# Altium PCB nrf52840_bma250e.PcbDoc
Units mil, origin at the board's own origin, x right, y up, seen from the top; angles counter-clockwise.
Board outline 748.03 x 984.25 mil, 2 copper layers (Top Layer, Bottom Layer), stack 12.8 mil thick; 27 components, 62 nets, 152 pads, 43 vias.
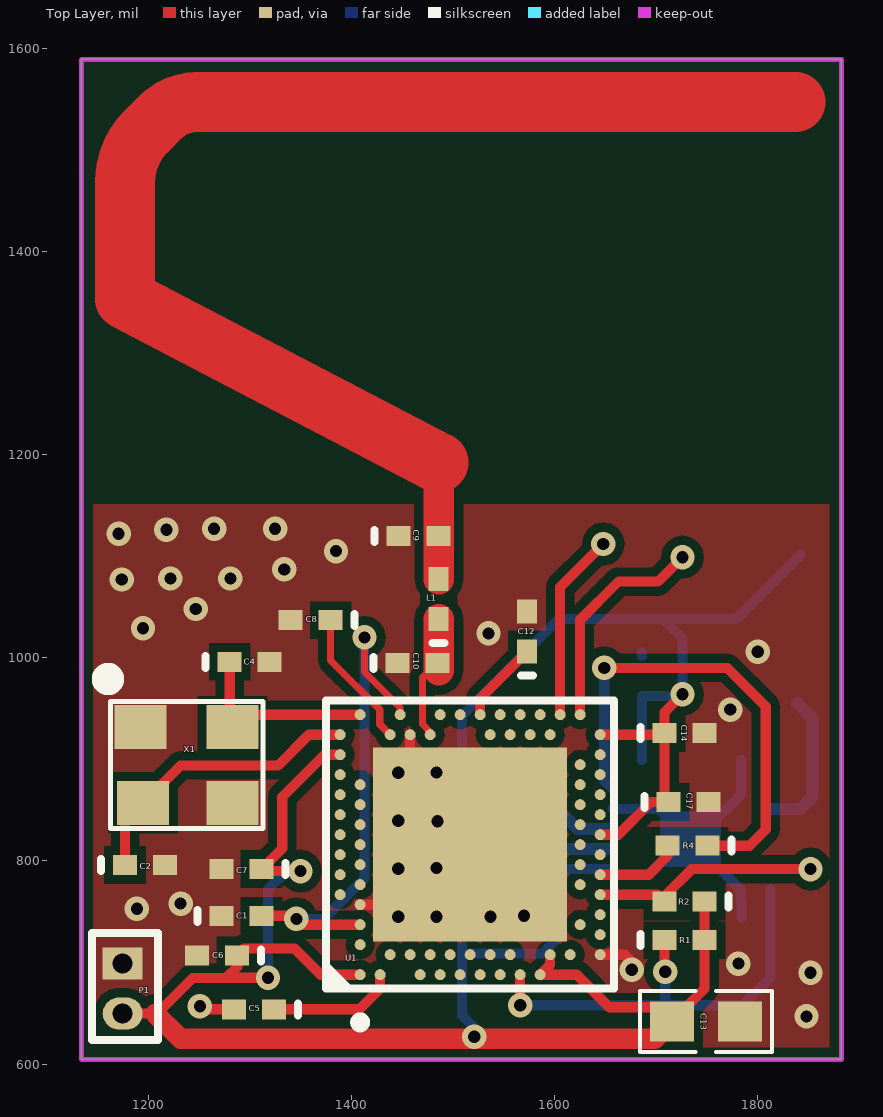
[diagram p0: Top Layer view]
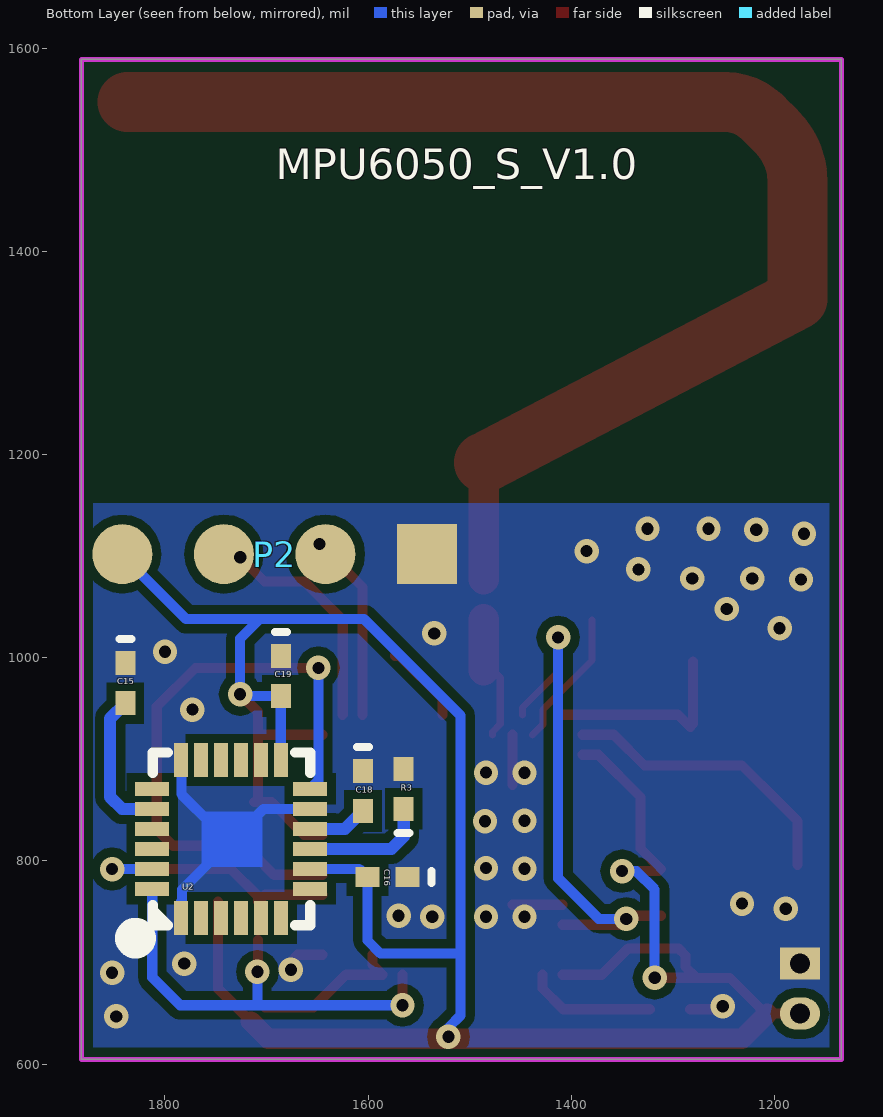
[diagram p1: Bottom Layer view, seen from below]

## Layer stack, top to bottom
Top Layer: signal copper 1.4
Dielectric: core 10, FR-4, Dk 4.2
Bottom Layer: signal copper 1.4

## Board outline
1134.28,604.76 1882.31,604.76 1882.31,1589.02 1134.28,1589.02

## Design rules (kind name [scope] priority, off if disabled: settings)
Clearance [All] p1: gap=5
ComponentClearance [All] p1 off: gap=10 collisioncheckmode=3 verticalgap=10 showdistances=FALSE
Height [All] p1 off: minheight=0 maxheight=1000 prefheight=500
MinimumSolderMaskSliver [All] p1 off: minsoldermaskwidth=10
NetAntennae [All] p1 off: netantennaetolerance=0
PlaneConnect [All] p1: planeconnectstyle=Direct reliefexpansion=20 reliefentries=4 reliefconductorwidth=10 reliefairgap=10
PolygonConnect [All] p1: connectstyle=Direct reliefconductorwidth=10 reliefentries=4 polygonreliefangle="90 Angle"
RoutingVias [All] p1: holewidth=28 width=50 viastyle="Through Hole" minholewidth=28 minwidth=50 maxholewidth=28 maxwidth=50
SilkToSilkClearance [All] p1 off: silktosilkclearance=10
SilkscreenOverComponentPads SilkToSolderMaskClearance [IsPad] p1 off: minsilkscreentomaskgap=10
SolderMaskExpansion [All] p1: expansion=4
Width [All] p1: maxlimit=100 minlimit=1 preferedwidth=10 minimp=50.000000 maximp=50.000000 favimp=50.000000
21 further rules are at their usual default settings.

## Components (designator, comment, footprint, x,y, rotation, side; value= is the part's Value field where it differs from the comment)
C1 "1.0μF" 0402-A 1292,746 r0 top
C2 "12pF" 0402-A 1197,796 r0 top
C4 "12pF" 0402-A 1300,996 r0 top
C5 "100nF" 0402-A 1304,654 r180 top
C6 "1.0μF" 0402-A 1268,707 r180 top
C7 "100nF" 0402-A 1292,792 r180 top
C8 "100pF" 0402-A 1360,1037 r180 top
C9 "NC" 0402-A 1466,1120 r0 top
C10 "NC" 0402-A 1465,995 r0 top
C12 "820pF" 0402-A 1573,1026 r90 top
C13 "4.7μF" 0603-1 1749,642 r0 top
C14 "100nF" 0402-a 1728,926 r0 top
C15 "2.2nf" 0402-A 1839,975 r270 bottom
C16 "0.1uF" 0402-A 1581,784 r0 bottom
C17 "100nF" 0402-a 1732,858 r0 top
C18 "0.1uF" 0402-A 1605,869 r270 bottom
C19 "0.1uF" 0402-A 1686,982 r270 bottom
L1 "NC" 0402-A 1486,1058 r90 top
P1 "Header 2" HDR1_2_1.25 1175,699 r270 top
P2 "Header 4" HDR1X4 1542,1102 r0 top
R1 "4.7K" 0402-A 1728,722 r0 top
R2 "4.7K" 0402-A 1728,760 r180 top
R3 "4.7K" 0402-A 1565,871 r90 bottom
R4 "0R" 0402-A 1731,815 r180 top
U1 "nRF52840-QIAA" AQFN50P700X700X85_HS-74N 1517,816 r90 top
U2 "mpu6050" mpu6050 1784,744 r90 bottom
X1 "32MHz" SMD3225 1283,932 r180 top

## Footprints (in the part's own frame and the unit in brackets; to place one, negate y for a bottom-side part, rotate by r counter-clockwise, add the part's x,y. Pads: shape width x height; smd on the part's side, far side on the other; paste and mask are expansions set on the pad)
0402-A [mm] "Chip Inductor; Body 1 x 0.5 mm (LxW typ)"
  rect 0.6x0.5 smd: 1(-0.5,0) 2(0.5,0)
  silkscreen extent -1.1,-0.15 -1.1,0.15
0402-a [mm] "Chip Inductor; Body 1 x 0.5 mm (LxW typ)"
  rect 0.6x0.5 smd: 1(-0.5,0) 2(0.5,0)
  silkscreen extent -1.1,-0.15 -1.1,0.15
0603-1 [mm]
  rect 1.1x1 smd: 1(-0.85,0) 2(0.85,0)
  silkscreen extent -1.65,-0.76 1.65,0.76, body extent -1.14,-0.38 1.14,0.38, height 1
AQFN50P700X700X85_HS-74N [mm]
  rect 4.85x4.85 smd mask+0.05: 74(0,0)
  round 0.275 smd paste+0.012 mask+0.05: A8(-1.25,3.25) A10(-0.75,3.25) A12(-0.25,3.25) A14(0.25,3.25) A16(0.75,3.25) A18(1.25,3.25) A20(1.75,3.25) A22(2.25,3.25) A23(2.75,3.25) AA24(3.25,-2.25) AB2(-2.75,-2.5) AC5(-2,-2.75) AC9(-1,-2.75) AC11(-0.5,-2.75) AC13(0,-2.75) AC15(0.5,-2.75) AC17(1,-2.75) AC19(1.5,-2.75) AC21(2,-2.75) AC24(3.25,-2.75) AD2(-2.75,-3.25) AD4(-2.25,-3.25) AD6(-1.75,-3.25) AD8(-1.25,-3.25) AD10(-0.75,-3.25) AD12(-0.25,-3.25) AD14(0.25,-3.25) AD16(0.75,-3.25) AD18(1.25,-3.25) AD20(1.75,-3.25) AD22(2.25,-3.25) AD23(2.75,-3.25) B1(-3.25,2.75) B3(-2.5,2.75) B5(-2,2.75) B7(-1.5,2.75) B9(-1,2.75) B11(-0.5,2.75) B13(0,2.75) B15(0.5,2.75) B17(1,2.75) B19(1.5,2.75) B24(3.25,2.75) C1(-3.25,2.25) D2(-2.75,2) D23(2.75,2) E24(3.25,1.75) F2(-2.75,1.5) F23(2.75,1.5) G1(-3.25,1.25) H2(-2.75,1) H23(2.75,1) J1(-3.25,0.75) J24(3.25,0.75) K2(-2.75,0.5) L1(-3.25,0.25) L24(3.25,0.25) M2(-2.75,0) N1(-3.25,-0.25) N24(3.25,-0.25) P2(-2.75,-0.5) P23(2.75,-0.5) R1(-3.25,-0.75) R24(3.25,-0.75) T2(-2.75,-1) T23(2.75,-1) U1(-3.25,-1.25) U24(3.25,-1.25) V23(2.75,-1.5) W1(-3.25,-1.75) W24(3.25,-1.75) Y2(-2.75,-2) Y23(2.75,-2)
  silkscreen extent -4.56,-3.6 3.6,3.6, body extent -3.55,-3.55 3.55,3.55, height 0.85
HDR1_2_1.25 [mm]
  rect 0.8x1 hole 0.5: 1(0,0)
  oval 0.8x1 hole 0.5: 2(1.25,0)
  silkscreen extent -0.76,-0.76 1.91,0.89
HDR1X4 [mm] "Connector; Header; 4 Position"
  rect 1.5x1.5 smd far side: 1(0,0)
  round 1.5 smd far side: 2(2.54,0) 3(5.08,0) 4(7.62,0)
mpu6050 [mm]
  rect 0.85x0.35 smd: 1(0,0) 2(0,-0.5) 3(0,-1) 4(0,-1.5) 5(0,-2) 6(0,-2.5) 13(3.95,-2.5) 14(3.95,-2) 15(3.95,-1.5) 16(3.95,-1) 17(3.95,-0.5) 18(3.95,0)
  rect 0.35x0.85 smd: 7(0.725,-3.225) 8(1.225,-3.225) 9(1.725,-3.225) 10(2.225,-3.225) 11(2.725,-3.225) 12(3.225,-3.225) 19(3.225,0.725) 20(2.725,0.725) 21(2.225,0.725) 22(1.725,0.725) 23(1.225,0.725) 24(0.725,0.725)
  Top Layer region: 1.267,-0.508 2.664,-0.508 2.664,-2.032 1.267,-2.032
  silkscreen extent -0.63,-3.22 4.13,1.27
SMD3225 [mm]
  rect 1.3x1.1 smd: 1(0,0) 2(2.3,0) 3(2.23,1.9) 4(0,1.9)
  silkscreen extent -0.76,-1.32 3.24,2.54

## Part data
C1 C6: library part C0603-1?, "Capacitor, X7R, ±10%"
C2 C4: library part C0402-12p, "Capacitor, NP0, ±2%"
C5 C7 C14 C17: library part C0402-100n, "Capacitor, X7R, ±10%"
C8: library part C0402-100p, "Capacitor, NP0, ±5%"
C9 C10: library part C0402-0.8p, "Capacitor, NP0, ±10%"
C12: library part C0402-820p, "Capacitor, NP0, ±5%"
C13: library part C0603-4μ7-6.3, "Capacitor, X7R, ±10%"
C15 C16 C18 C19: library part C0402-0.5p, "Capacitor, NP0, ±10%"
L1: library part L0402-4n7, "High frequency chip inductor ±5%"
P1: "Header, 2-Pin"
P2: "Header, 4-Pin"
R1 R2 R3 R4: library part Res1, "Resistor"
U1: library part nRF52840-QIAAD0, "Multi-protocol Bluetooth Low Energy, IEEE 802.15.4, ANT and 2.4GHz proprietary system-on-chip"
X1: library part XTAL_SMD2016_32MHz_8pF_General, "XTAL SMD 2016, 32MHz, Cl=8pF, Total Tol: ±40ppm"

## Via types
v1: diameter 24, hole 12, Top Layer to Bottom Layer, 43 vias

## Nets (pads, with @x,y where several pads share a name; then routed paths per layer and width w, separated by ;. In a path a pad name is that pad's centre, name@x,y a point inside that pad or via, vN(x,y) a via of type N, cw(c..) or ccw(c..) an arc to the next point about the centre after c; other vN are vias at no path point)
DEC1: C5.1 U1.C1 | length 127.8
  Top Layer w10: C5.1@1322.69,654 1408,654 1428.42,674.42 U1.C1
DEC3: C8.1 U1.D23 | length 137
  Top Layer w7: C8.1 1379.69,997.32 1428,949 1428,934.53 U1.D23
DEC4_6: C1.2 U1.B5 U1.E24 | length 511.8
  Top Layer w7: v1(1413,1020) 1413,986 1448.1,950.9 U1.E24
  Top Layer w10: C1.2 1341,746 1349.74,737.26 U1.B5
  Bottom Layer w10: v1(1346,743) 1373,743 1413,783 v1(1413,1020)
GND: C1.1 C2.2 C4.2 C5.2 C6.2 C7.2 C8.2 C9.1 C10.1 C12.2 C13.2 C14.2 C15.1 C16.1 C17.2 C18.1 C19.1 P1.1 P2.1 R3.2 U1.74 U1.AD2 U1.B7 U1.F23 U2.1 U2.11 U2.18 X1.2 X1.4 | length 401.6
  Top Layer w10: v1(1251,657) 1254,654 C5.2@1283.31,654 ; U1.B7 U1.74@1457.94,756.94 ; U1.74@1457.94,875.06 U1.F23 ; U1.AD2 1669.27,707.73 1676,701 v1(1676,693)
  Bottom Layer w10: U2.11 1702.72,851.28 1717,837 ; C19.1 C19.1@1686,1005 ; 1744,834 1752,834 1783.81,865.81 1783.81,899.32 U2.18 ; 1753,803 1753,802 1783.2,771.8 1783.2,761 1784,760.2 U2.1
  other v1: 1848,647 1852,690 1781,699 1446.13,745.13 1484,745 1537,745 1570,746 1189,753 1232,758 1446.13,792.38 1484,793 1485,839 1446.13,839.62 1446.13,886.87 1484,887 1773,949 1800,1006 1535,1024 1195,1029 1247,1048 1174,1077 1222,1078 1281,1078 1334,1087 1385,1105 1171,1122 1218,1126 1265,1127 1325,1127
NetC10_2: C10.2 L1.1 U1.H23 | length 130
  Top Layer w7: U1.H23 1477.63,927.09 1470,934.72 1470,980.31 C10.2
  Top Layer w30: C10.2@1486,987.76 L1.1@1486,1037.76
NetC12_1: C12.1 U1.N24 | length 79.8
  Top Layer w10: U1.N24 1526.84,959.84 1569,1002 C12.1@1573.32,1002
NetC15_2: C15.2 U2.20 | length 144.8
  Bottom Layer w12: U2.20 1842.28,851.28 1854,863 1854,940.31 C15.2
NetC18_2: C18.2 U2.10 | length 59.4
  Bottom Layer w12: C18.2 1622.72,831.6 U2.10
NetR3_1: R3.1 U2.9 | length 124.4
  Bottom Layer w12: R3.1 1565,824 1577.09,811.91 U2.9
NetR4_1: R4.1 U2.12 | length 482
  Top Layer w10: v1(1649,990) 1770,990 1808,952 1808,831 1792,815 R4.1
  Bottom Layer w10: v1(1649,990) 1649,879 U2.12
P0.02/AIN0: U1.A12
P0.03/AIN1: U1.B13
P0.04/AIN2: U1.J1
P0.05/AIN3: U1.K2
P0.06: U1.L1
P0.07: U1.M2
P0.08: U1.N1
P0.09/NFC1: U1.L24
P0.10/NFC2: U1.J24
P0.11: U1.T2
P0.12: R1.1 U1.U1 U2.24 | length 439.1
  Top Layer w10: v1(1566.21,658) U1.U1 ; R1.1 1708.32,691.68 v1(1709,691)
  Bottom Layer w10: v1(1566.21,658) 1709,658 ; v1(1709,691) 1709,658 ; U2.24 1812.54,685.54 1785,658 1709,658
P0.13: R2.2 U1.AD8 U2.23 | length 265.5
  Top Layer w10: U1.AD8 1701.53,766.79 R2.2 1708.31,765.31 1735,792 v1(1852,792)
  Bottom Layer w10: U2.23 v1@1851.77,792.23
P0.14: U1.AC9
P0.15: R4.2 U1.AD10 | length 84
  Top Layer w10: U1.AD10 1692.79,786.47 1711.31,805 R4.2
P0.16: U1.AC11
P0.17: U1.AD12
P0.18/RESET: U1.AC13
P0.19: U1.AC15
P0.20: U1.AD16
P0.21: U1.AC17
P0.22: U1.AD18
P0.23: U1.AC19
P0.24: U1.AD20
P0.25: U1.AC21
P0.26: U1.G1
P0.27: U1.H2
P0.28/AIN4: U1.B11
P0.29/AIN5: U1.A10
P0.30/AIN6: U1.B9
P0.31/AIN7: U1.A8
P1.00: U1.AD22
P1.01: U1.Y23
P1.02: U1.W24
P1.03: U1.V23
P1.04: U1.U24
P1.05: U1.T23
P1.06: U1.R24
P1.07: U1.P23
P1.08: U1.P2
P1.09: U1.R1
P1.10: U1.A20
P1.11: U1.B19
P1.12: U1.B17
P1.13: U1.A16
P1.14: U1.B15
P1.15: U1.A14
RF: C9.2 L1.2 | length 1282.3
  Top Layer w30: 1486,1192 1486,1115.76 1486.31,1115.45 L1.2@1486.31,1077.45
  Top Layer w59.06: 1486,1192 1177.25,1352.94 1177.25,1467.91 cw(c1248.09,1467.91) 1198,1518 1212,1532 cw(c1248.21,1495.79) 1248.21,1547 1837,1547
SWDCLK: P2.2 U1.AA24 | length 185.6
  Top Layer w10: U1.AA24 1605.58,1069.58 v1(1648,1112)
SWDIO: P2.3 U1.AC24 | length 219.8
  Top Layer w10: U1.AC24 1625,944.22 1625,1037 1663,1075 1702,1075 v1(1725.98,1098.98)
VDD_NRF: C6.1 C7.1 C13.1 C14.1 C16.2 C17.1 C19.2 P1.2 P2.4 R1.2 R2.1 U1.A22 U1.AD14 U1.AD23 U1.B1 U1.W1 U1.Y2 U2.8 U2.13 | length 2820.9
  Top Layer w10: P1.2 1207.21,649.79 1213.79,649.79 1213.79,654.79 1243.84,684.84 1276.84,684.84 1277,685 ; C7.1 1332,812.32 1332,863 1373.58,904.58 U1.A22 ; C7.1@1313.69,790 v1(1350,790) ; v1(1318,685) 1277,685 ; U1.B1 1369.95,688.05 1344,714 1294.69,714 C6.1 1287.69,695.68 1277,685 ; U1.Y2 1595.74,697.89 U1.W1 1621.95,688.05 1654,656 C13.1@1701.54,656 ; U1.AD14 1662.84,825.84 1695,858 C17.1 ; U1.AD23 C14.1@1706.58,924.27 ; C17.1@1708.32,862 C14.1 1708.32,946.32 v1(1726,964) ; C13.1 1747.69,674.15 R1.2 R2.1
  Top Layer w20: 1207.21,649.79 1232,625 1698.54,625 C13.1
  Bottom Layer w10: v1(1318,685) 1318,772 1336,790 v1(1350,790) ; 1510,709 1588,709 1600.69,721.69 C16.2 1608.91,792.23 U2.8 ; v1(1521,627) 1521,636 1509,648 1509,943 1604,1038 1707,1038 ; U2.13 1686,899.94 C19.2 v1@1724.31,962.31 ; v1(1726,964) 1726,1019 1707,1038 ; P2.4 1842,1101 1779,1038 1707,1038
XC1: C4.1 U1.B24 X1.1 | length 192
  Top Layer w10: X1.1@1280.32,934.68 C4.1 ; X1.1 1294.95,943.95 U1.B24
XC2: C2.1 U1.A23 X1.3 | length 290.2
  Top Layer w10: C2.1 1177.32,839.31 X1.3 1232.01,894 1328,894 1358.27,924.27 U1.A23
pads on no net: U1.A18 U1.AB2 U1.AC5 U1.AD4 U1.AD6 U1.B3 U1.D2 U1.F2 U2.2 U2.3 U2.4 U2.5 U2.6 U2.7 U2.14 U2.15 U2.16 U2.17 U2.19 U2.21 U2.22

## Polygon pours and split planes (outlines as drawn)
GND on Top Layer "Bottom Layer-No Net 1" (solid, remove dead copper, pour order 6): 1459,1151 2025,1151 2026,1150 2039,1137 2039,507 1008,507 992,491 1099,598 1099,1151
GND on Bottom Layer "Bottom Layer-No Net 1" (solid, remove dead copper, pour order 10): 1080,1151 1081,1152 1972,1152 1972,576 1976,572 1973,575 1076,575

## Keep-outs
Keep-Out Layer:
  the board outline again, w5

## Silkscreen, mask and mechanical layers (free items; w line width, h text height)
Bottom Overlay:
  text "MPU6050_S_V1.0" at 1691,1471 h30
Top Solder:
  lines w59.06: 1486,1192 1177.25,1352.94 1177.25,1467.91 cw(c1248.09,1467.91) 1198,1518 1212,1532 cw(c1248.21,1495.79) 1248.21,1547 1837,1547